# Altium PCB 发光公交卡2021-3_2.PcbDoc
Units mil, origin at the board's own origin, x right, y up, seen from the top; angles counter-clockwise.
Board outline 3346.46 x 2125.98 mil, 2 copper layers (Top Layer, Bottom Layer); 4 components, 0 nets, 156 pads, 2 vias.
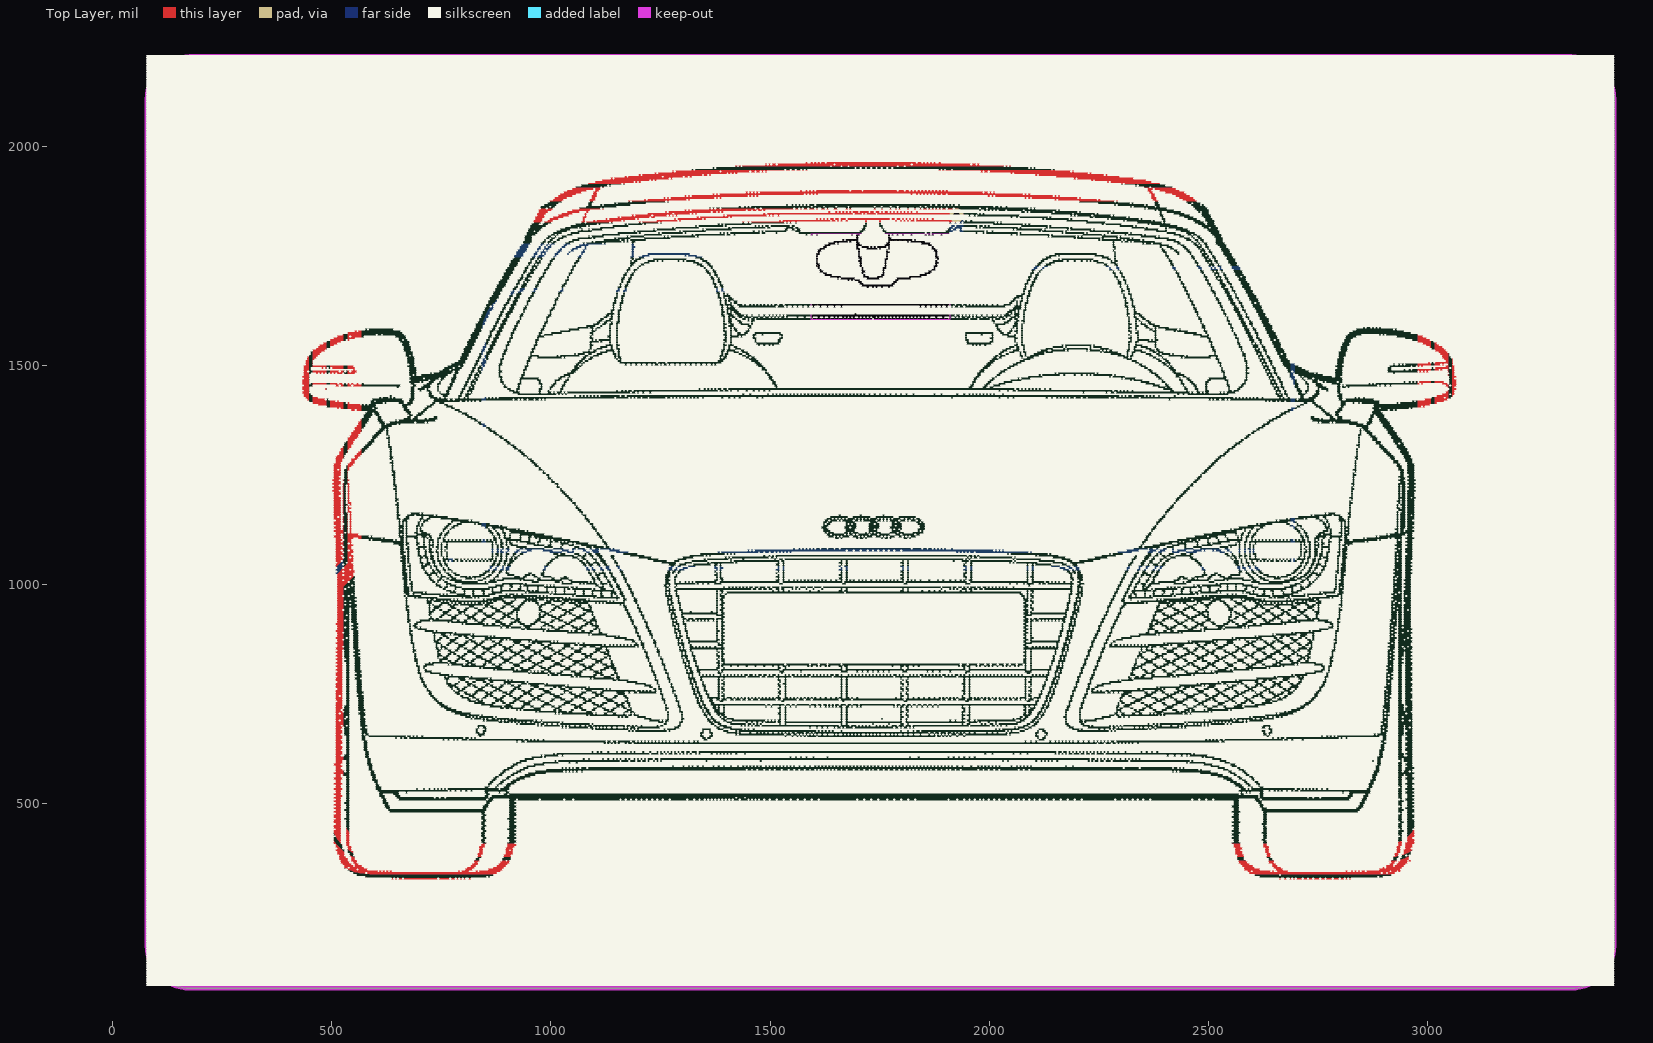
[diagram p0: Top Layer view]
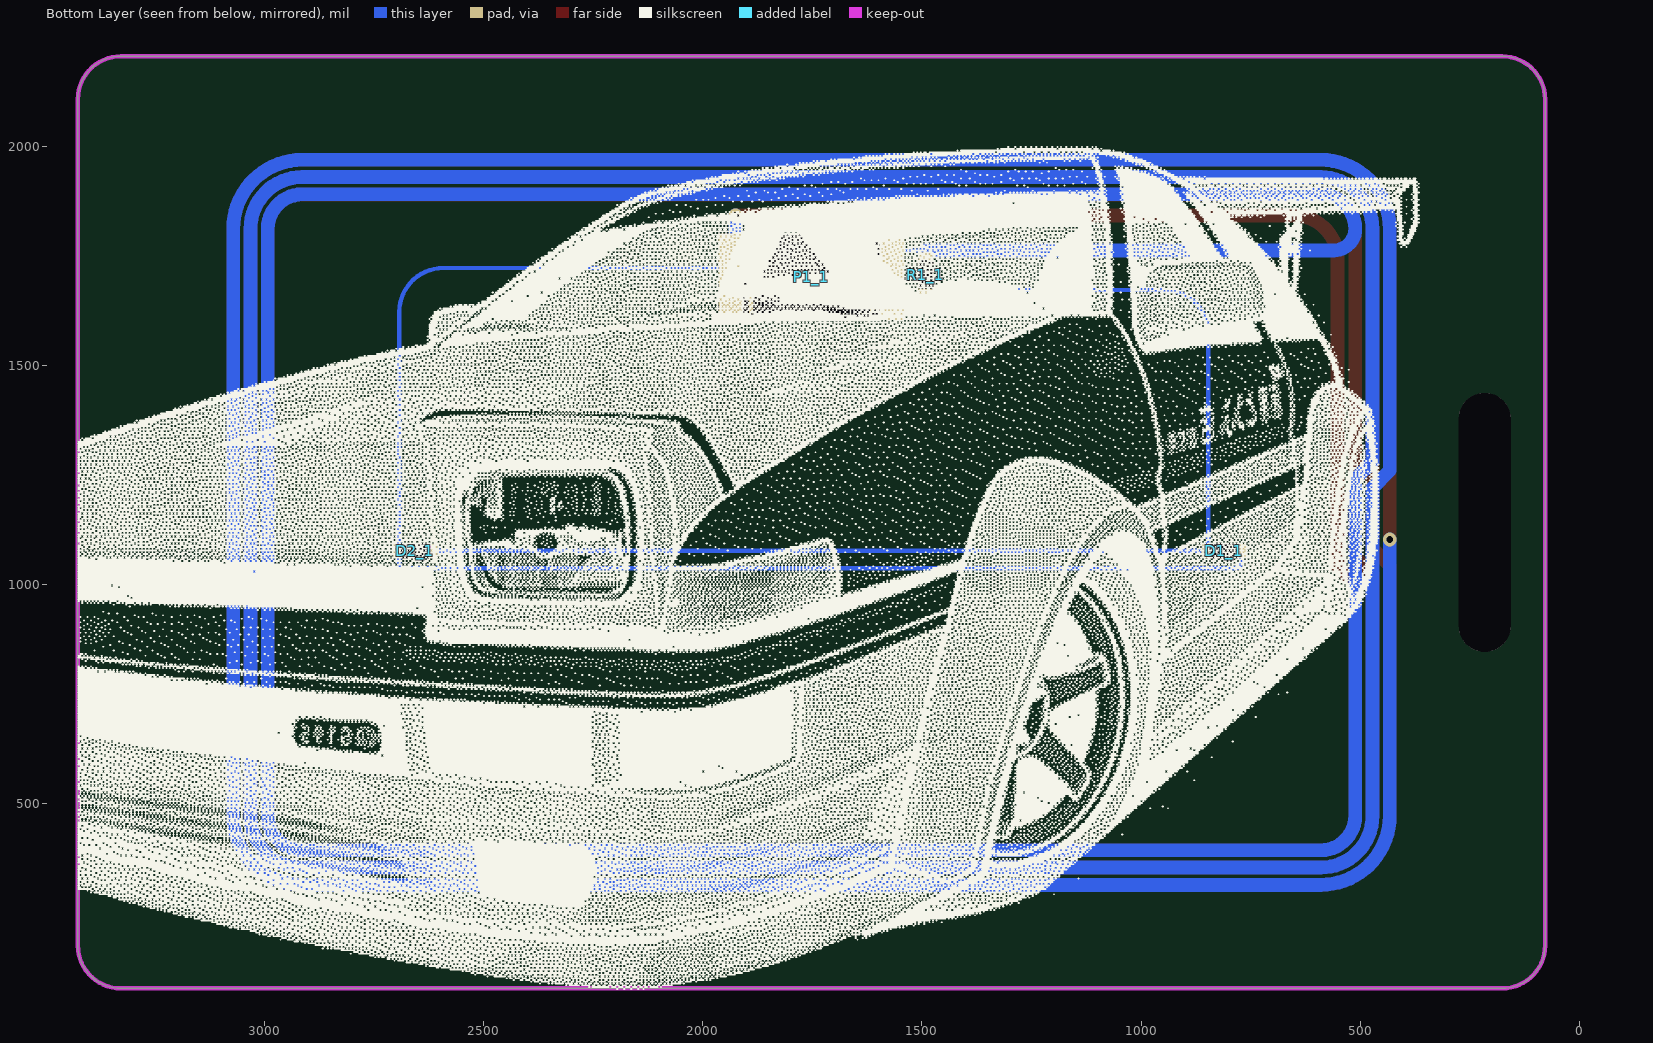
[diagram p1: Bottom Layer view, seen from below]

## Layer stack, top to bottom
Top Solder: solder mask 0.4, Solder Resist, Dk 3.5
Top Layer: signal copper 1.4
Dielectric 1: dielectric 12.6, FR-4, Dk 4.8
Bottom Layer: signal copper 1.4
Bottom Solder: solder mask 0.4, Solder Resist, Dk 3.5

## Board outline
78.74,176.73 ccw(c177.17,177.17) 176.97,78.74 176.73,78.74 3326.97,78.74 ccw(c3326.77,177.17) 3425.2,176.73 3425.2,176.97 3425.2,2106.5 3425.2,2106.73 ccw(c3326.77,2106.3) 3326.97,2204.72 176.73,2204.72 176.97,2204.72 ccw(c177.17,2106.3) 78.74,2106.73
cut-out: 1594.49,1603.31 1594.49,1800.16 1909.45,1800.16 1909.45,1603.31

## Design rules (kind name [scope] priority, off if disabled: settings)
Clearance [All] p1: gap=10
PolygonConnect [All] p1: connectstyle=Relief reliefconductorwidth=10 reliefentries=4 polygonreliefangle="90 Angle" airgapwidth=10
RoutingVias [All] p1: holewidth=28 width=50 viastyle="Through Hole" minholewidth=28 minwidth=50 maxholewidth=28 maxwidth=50
SolderMaskExpansion [All] p1: expansion=4
Width [All] p1: maxlimit=10 minlimit=10 preferedwidth=10
30 further rules are at their usual default settings.

## Components (designator, comment, footprint, x,y, rotation, side; value= is the part's Value field where it differs from the comment)
D1_1 "LED2" LED_0603_EMBED 811.97,1076.73 r0 bottom (schematic designator D1)
D2_1 "LED2" LED_0603_EMBED 2656.97,1076.73 r0 bottom (schematic designator D2)
P1_1 "Header 2" NFC_8*5 1751.97,1701.73 r0 bottom (schematic designator P1)
R1_1 "Res1" LED_0603_EMBED 1491.97,1706.73 r90 bottom (schematic designator R1)

## Footprints (in the part's own frame and the unit in brackets; to place one, negate y for a bottom-side part, rotate by r counter-clockwise, add the part's x,y. Pads: shape width x height; smd on the part's side, far side on the other; paste and mask are expansions set on the pad)
LED_0603_EMBED [mm]
  round 0.4 hole 0.4: 0(-0.635,-0.254) 0(-0.635,0) 0(-0.635,0.254) 0(-0.381,-0.254) 0(-0.381,0) 0(-0.381,0.254) 0(-0.127,-0.254) 0(-0.127,0.254) 0(0,0) 0(0.127,-0.254) 0(0.127,0.254) 0(0.254,0) 0(0.381,-0.254) 0(0.381,0.254) 0(0.635,-0.254) 0(0.635,0) 0(0.635,0.254)
  rect 0.8x0.8 smd: 1(-0.889,0) 2(0.889,0)
NFC_8*5 [mm]
  round 0.4 hole 0.4: 0(-3.81,-2.286) 0(-3.81,-2.032) 0(-3.81,-1.778) 0(-3.81,-1.524) 0(-3.81,-1.27) 0(-3.81,-1.016) 0(-3.81,-0.762) 0(-3.81,-0.508) 0(-3.81,-0.254) 0(-3.81,0) 0(-3.81,0.254) 0(-3.81,0.508) 0(-3.81,0.762) 0(-3.81,1.016) 0(-3.81,1.27) 0(-3.81,1.524) 0(-3.81,1.778) 0(-3.81,2.032) 0(-3.81,2.286) 0(-3.556,-2.286) 0(-3.556,2.286) 0(-3.302,-2.286) 0(-3.302,2.286) 0(-3.048,-2.286) 0(-3.048,2.286) 0(-2.794,-2.286) 0(-2.794,2.286) 0(-2.54,-2.286) 0(-2.54,2.286) 0(-2.286,-2.286) 0(-2.286,2.286) 0(-2.032,-2.286) 0(-2.032,2.286) 0(-1.778,-2.286) 0(-1.778,2.286) 0(-1.524,-2.286) 0(-1.524,2.286) 0(-1.27,-2.286) 0(-1.27,2.286) 0(-1.016,-2.286) 0(-1.016,2.286) 0(-0.762,-2.286) 0(-0.762,2.286) 0(-0.508,-2.286) 0(-0.508,2.286) 0(-0.254,-2.286) 0(-0.254,2.286) 0(0,-2.286) 0(0,2.286) 0(0.254,-2.286) 0(0.254,2.286) 0(0.508,-2.286) 0(0.508,2.286) 0(0.762,-2.286) 0(0.762,2.286) 0(1.016,-2.286) 0(1.016,2.286) 0(1.27,-2.286) 0(1.27,2.286) 0(1.524,-2.286) 0(1.524,2.286) 0(1.778,-2.286) 0(1.778,2.286) 0(2.032,-2.286) 0(2.032,2.286) 0(2.286,-2.286) 0(2.286,2.286) 0(2.54,-2.286) 0(2.54,2.286) 0(2.794,-2.286) 0(2.794,2.286) 0(3.048,-2.286) 0(3.048,2.286) 0(3.302,-2.286) 0(3.302,2.286) 0(3.556,-2.286) 0(3.556,2.286) 0(3.81,-2.286) 0(3.81,-2.032) 0(3.81,-1.778) 0(3.81,-1.524) 0(3.81,-1.27) 0(3.81,-1.016) 0(3.81,-0.762) 0(3.81,-0.508) 0(3.81,-0.254) 0(3.81,0) 0(3.81,0.254) 0(3.81,0.508) 0(3.81,0.762) 0(3.81,1.016) 0(3.81,1.27) 0(3.81,1.524) 0(3.81,1.778) 0(3.81,2.032) 0(3.81,2.286)
  rect 2x5 smd: 1(-4.4,0) 2(4.4,0)
  silkscreen extent -4,-2.5 4,2.5

## Free pads (board coordinates)
  oval 118.11x590.55 hole 118.11 slot 590.55 at 90 deg: 0(216.54,1141.73)

## Via types
v1: diameter 31.5, hole 15.75, Top Layer to Bottom Layer, 2 vias

## Nets (pads, with @x,y where several pads share a name; then routed paths per layer and width w, separated by ;. In a path a pad name is that pad's centre, name@x,y a point inside that pad or via, vN(x,y) a via of type N, cw(c..) or ccw(c..) an arc to the next point about the centre after c; other vN are vias at no path point)
pads on no net: D1_1.0 D1_1.1 D1_1.2 D2_1.0 D2_1.1 D2_1.2 P1_1.0 P1_1.1 P1_1.2 R1_1.0 R1_1.1 R1_1.2
copper on no net: | length 57506.8
  Top Layer w31.5: v1(433.07,1102.38) 433.07,1811.04 cw(c590.55,1811.04) 590.55,1968.52 2913.39,1968.52 cw(c2913.39,1811.04) 3070.87,1811.04 3070.87,472.46 cw(c2913.39,472.46) 2913.39,314.98 590.52,314.94 ; 511.81,472.46 ccw(c590.55,472.46) 590.55,393.72 2913.39,393.71 ccw(c2913.39,472.46) 2992.13,472.46 2992.13,1811.04 ccw(c2913.39,1811.04) 2913.39,1889.78 590.55,1889.78 ccw(c590.55,1811.04) 511.81,1811.04 511.81,1063.01 472.44,1023.64 472.44,472.46 ccw(c590.55,472.46) 590.55,354.35 2913.39,354.35 ccw(c2913.39,472.46) 3031.5,472.46 3031.5,1811.04 ccw(c2913.39,1811.04) 2913.39,1929.15 590.55,1929.15 ccw(c590.55,1811.04) 472.44,1811.04 472.44,1082.69 433.07,1043.32 433.07,472.46 ccw(c590.55,472.46) 590.55,314.98 ; 511.8,472.48 511.8,1001.57 551.97,1041.73 551.97,1721.73 ; 551.97,1596.73 551.97,1741.73 cw(c651.97,1741.73) 651.97,1841.73 v1(1925.2,1841.73)
  Bottom Layer w10: 776.97,1076.73 ccw(c776.97,1071.73) 771.97,1071.73 771.97,1051.73 ccw(c786.97,1051.73) 786.97,1036.73 2681.97,1036.73 ccw(c2681.97,1046.73) 2691.97,1046.73 2691.97,1076.73 2691.97,1621.73 ccw(c2591.97,1621.73) 2591.97,1721.73 1925.2,1721.73 ; 1491.97,1671.73 946.97,1671.73 ccw(c946.97,1571.73) 846.97,1571.73 846.97,1531.73 846.97,1076.73 2621.97,1076.73 ; 1496.97,1766.73 ccw(c1496.97,1761.73) 1491.97,1761.73 1571.97,1761.73
  Bottom Layer w31.5: v1(433.07,1102.38) 433.07,472.47 ccw(c590.55,472.47) 590.55,314.99 ; 511.81,1811.05 cw(c590.55,1811.05) 590.55,1889.79 2913.39,1889.8 cw(c2913.39,1811.06) 2992.13,1811.06 2992.13,472.47 cw(c2913.39,472.47) 2913.39,393.73 590.55,393.73 cw(c590.55,472.47) 511.81,472.47 511.81,1240.17 472.44,1279.54 472.44,1811.06 cw(c590.55,1811.05) 590.55,1929.16 2913.39,1929.17 cw(c2913.39,1811.06) 3031.5,1811.06 3031.5,472.47 cw(c2913.39,472.47) 2913.39,354.36 590.55,354.36 cw(c590.55,472.47) 472.44,472.47 472.44,1220.49 433.07,1259.86 433.07,1811.06 cw(c590.55,1811.05) 590.55,1968.53 2913.39,1968.54 cw(c2913.39,1811.06) 3070.87,1811.06 3070.87,472.47 cw(c2913.39,472.47) 2913.39,314.99 590.52,314.96 ; 511.8,1811.08 ccw(c561.15,1811.08) 561.15,1761.73 1491.97,1761.73 ; 1925.2,1721.73 v1(1925.2,1841.73)

## Keep-outs
Keep-Out Layer:
  lines w10: 176.73,78.74 3326.97,78.74 ccw(c3326.77,177.17) 3425.2,176.73 ; 176.73,2204.72 3326.97,2204.72 cw(c3326.77,2106.3) 3425.2,2106.73 ; 176.97,78.74 cw(c177.17,177.17) 78.74,176.73 78.74,2106.73 cw(c177.17,2106.3) 176.97,2204.72 ; 3425.2,176.97 3425.2,2106.5

## Silkscreen, mask and mechanical layers (free items; w line width, h text height)
Top Overlay:
  drawing of 12566 lines, arcs and shapes, not listed
Bottom Overlay:
  drawing of 39314 lines, arcs and shapes, not listed